# EAGLE board 8x8_multiplexed_3.2x3.2_NSEW_headers (EAGLE 6.0)

Size 40.64 x 40.64 mm. Coordinates in mm from the lower left corner, seen from the top.
Outline: 0,0 0,40.64 40.64,40.64 40.64,0 0,0
Copper layers (1*16): Top 0.035mm / dielectric 1.5mm / Bottom 0.035mm
Design rules: minimum track width 10mil, minimum drill 24mil, track to track 8mil, track to pad 8mil, pad to pad 8mil, via to via 8mil, smd to smd 8mil, copper to edge 40mil, drill to drill 8mil, minimum pad ring 10mil, minimum via ring 8mil, stop-mask expansion 4mil, vias tented up to drill 0mil, thermal gap 10mil
Holes 3.2 mm at 5.08,5.08 5.08,35.56 35.56,5.08 35.56,35.56

## Footprints (pad centres in the part's own frame; a part is rotated, then mirrored left to right if it is on the bottom)
LED3MM = drill 0.813 octagon: A -1.27,0; K 1.27,0
1X01 = drill 1.016 octagon: 1 0,0

## Placement (x,y rotation side)
00  [LED3MM]  2.54,2.54 0 top
01  [LED3MM]  7.62,2.54 0 top
02  [LED3MM]  12.7,2.54 0 top
03  [LED3MM]  17.78,2.54 0 top
04  [LED3MM]  22.86,2.54 0 top
05  [LED3MM]  27.94,2.54 0 top
06  [LED3MM]  33.02,2.54 0 top
07  [LED3MM]  38.1,2.54 0 top
10  [LED3MM]  2.54,7.62 0 top
11  [LED3MM]  7.62,7.62 0 top
12  [LED3MM]  12.7,7.62 0 top
13  [LED3MM]  17.78,7.62 0 top
14  [LED3MM]  22.86,7.62 0 top
15  [LED3MM]  27.94,7.62 0 top
16  [LED3MM]  33.02,7.62 0 top
17  [LED3MM]  38.1,7.62 0 top
20  [LED3MM]  2.54,12.7 0 top
21  [LED3MM]  7.62,12.7 0 top
22  [LED3MM]  12.7,12.7 0 top
23  [LED3MM]  17.78,12.7 0 top
24  [LED3MM]  22.86,12.7 0 top
25  [LED3MM]  27.94,12.7 0 top
26  [LED3MM]  33.02,12.7 0 top
27  [LED3MM]  38.1,12.7 0 top
30  [LED3MM]  2.54,17.78 0 top
31  [LED3MM]  7.62,17.78 0 top
32  [LED3MM]  12.7,17.78 0 top
33  [LED3MM]  17.78,17.78 0 top
34  [LED3MM]  22.86,17.78 0 top
35  [LED3MM]  27.94,17.78 0 top
36  [LED3MM]  33.02,17.78 0 top
37  [LED3MM]  38.1,17.78 0 top
40  [LED3MM]  2.54,22.86 0 top
41  [LED3MM]  7.62,22.86 0 top
42  [LED3MM]  12.7,22.86 0 top
43  [LED3MM]  17.78,22.86 0 top
44  [LED3MM]  22.86,22.86 0 top
45  [LED3MM]  27.94,22.86 0 top
46  [LED3MM]  33.02,22.86 0 top
47  [LED3MM]  38.1,22.86 0 top
50  [LED3MM]  2.54,27.94 0 top
51  [LED3MM]  7.62,27.94 0 top
52  [LED3MM]  12.7,27.94 0 top
53  [LED3MM]  17.78,27.94 0 top
54  [LED3MM]  22.86,27.94 0 top
55  [LED3MM]  27.94,27.94 0 top
56  [LED3MM]  33.02,27.94 0 top
57  [LED3MM]  38.1,27.94 0 top
60  [LED3MM]  2.54,33.02 0 top
61  [LED3MM]  7.62,33.02 0 top
62  [LED3MM]  12.7,33.02 0 top
63  [LED3MM]  17.78,33.02 0 top
64  [LED3MM]  22.86,33.02 0 top
65  [LED3MM]  27.94,33.02 0 top
66  [LED3MM]  33.02,33.02 0 top
67  [LED3MM]  38.1,33.02 0 top
70  [LED3MM]  2.54,38.1 0 top
71  [LED3MM]  7.62,38.1 0 top
72  [LED3MM]  12.7,38.1 0 top
73  [LED3MM]  17.78,38.1 0 top
74  [LED3MM]  22.86,38.1 0 top
75  [LED3MM]  27.94,38.1 0 top
76  [LED3MM]  33.02,38.1 0 top
77  [LED3MM]  38.1,38.1 0 top
EH0  [1X01]  35.56,11.43 0 top
EH1  [1X01]  35.56,13.97 0 top
EH2  [1X01]  35.56,16.51 0 top
EH3  [1X01]  35.56,19.05 0 top
EH4  [1X01]  35.56,21.59 0 top
EH5  [1X01]  35.56,24.13 0 top
EH6  [1X01]  35.56,26.67 0 top
EH7  [1X01]  35.56,29.21 0 top
NH0  [1X01]  11.43,35.56 0 top
NH1  [1X01]  13.97,35.56 0 top
NH2  [1X01]  16.51,35.56 0 top
NH3  [1X01]  19.05,35.56 0 top
NH4  [1X01]  21.59,35.56 0 top
NH5  [1X01]  24.13,35.56 0 top
NH6  [1X01]  26.67,35.56 0 top
NH7  [1X01]  29.21,35.56 0 top
SH0  [1X01]  11.43,5.08 0 top
SH1  [1X01]  13.97,5.08 0 top
SH2  [1X01]  16.51,5.08 0 top
SH3  [1X01]  19.05,5.08 0 top
SH4  [1X01]  21.59,5.08 0 top
SH5  [1X01]  24.13,5.08 0 top
SH6  [1X01]  26.67,5.08 0 top
SH7  [1X01]  29.21,5.08 0 top
WH0  [1X01]  5.08,11.43 0 top
WH1  [1X01]  5.08,13.97 0 top
WH2  [1X01]  5.08,16.51 0 top
WH3  [1X01]  5.08,19.05 0 top
WH4  [1X01]  5.08,21.59 0 top
WH5  [1X01]  5.08,24.13 0 top
WH6  [1X01]  5.08,26.67 0 top
WH7  [1X01]  5.08,29.21 0 top

## Library data of the parts
00 01-07 10-17 20-27 30-37 40-47 50-57 60-67 70-77 = led
EH0 EH1-EH7 NH0 NH1-NH7 SH0 SH1-SH7 WH0 WH1-WH7 = pinhead

## Nets
C0: 00.K 10.K 20.K 30.K 40.K 50.K 60.K 70.K NH0.1 SH0.1
C1: 01.K 11.K 21.K 31.K 41.K 51.K 61.K 71.K NH1.1 SH1.1
C2: 02.K 12.K 22.K 32.K 42.K 52.K 62.K 72.K NH2.1 SH2.1
C3: 03.K 13.K 23.K 33.K 43.K 53.K 63.K 73.K NH3.1 SH3.1
C4: 04.K 14.K 24.K 34.K 44.K 54.K 64.K 74.K NH4.1 SH4.1
C5: 05.K 15.K 25.K 35.K 45.K 55.K 65.K 75.K NH5.1 SH5.1
C6: 06.K 16.K 26.K 36.K 46.K 56.K 66.K 76.K NH6.1 SH6.1
C7: 07.K 17.K 27.K 37.K 47.K 57.K 67.K 77.K NH7.1 SH7.1
R0: 00.A 01.A 02.A 03.A 04.A 05.A 06.A 07.A EH0.1 WH0.1
R1: 10.A 11.A 12.A 13.A 14.A 15.A 16.A 17.A EH1.1 WH1.1
R2: 20.A 21.A 22.A 23.A 24.A 25.A 26.A 27.A EH2.1 WH2.1
R3: 30.A 31.A 32.A 33.A 34.A 35.A 36.A 37.A EH3.1 WH3.1
R4: 40.A 41.A 42.A 43.A 44.A 45.A 46.A 47.A EH4.1 WH4.1
R5: 50.A 51.A 52.A 53.A 54.A 55.A 56.A 57.A EH5.1 WH5.1
R6: 60.A 61.A 62.A 63.A 64.A 65.A 66.A 67.A EH6.1 WH6.1
R7: 70.A 71.A 72.A 73.A 74.A 75.A 76.A 77.A EH7.1 WH7.1

## Tracks (layer width: path | path; a pad name or v marks a point on that pad's centre or on a via)
C0  (9 unrouted)
C1  (9 unrouted)
C2  (9 unrouted)
C3  (9 unrouted)
C4  (9 unrouted)
C5  (9 unrouted)
C6  (9 unrouted)
C7  (9 unrouted)
R0  (9 unrouted)
R1  (9 unrouted)
R2  (9 unrouted)
R3  (9 unrouted)
R4  (9 unrouted)
R5  (9 unrouted)
R6  (9 unrouted)
R7  (9 unrouted)